# EAGLE board LTC_Balancer (EAGLE 5.06)
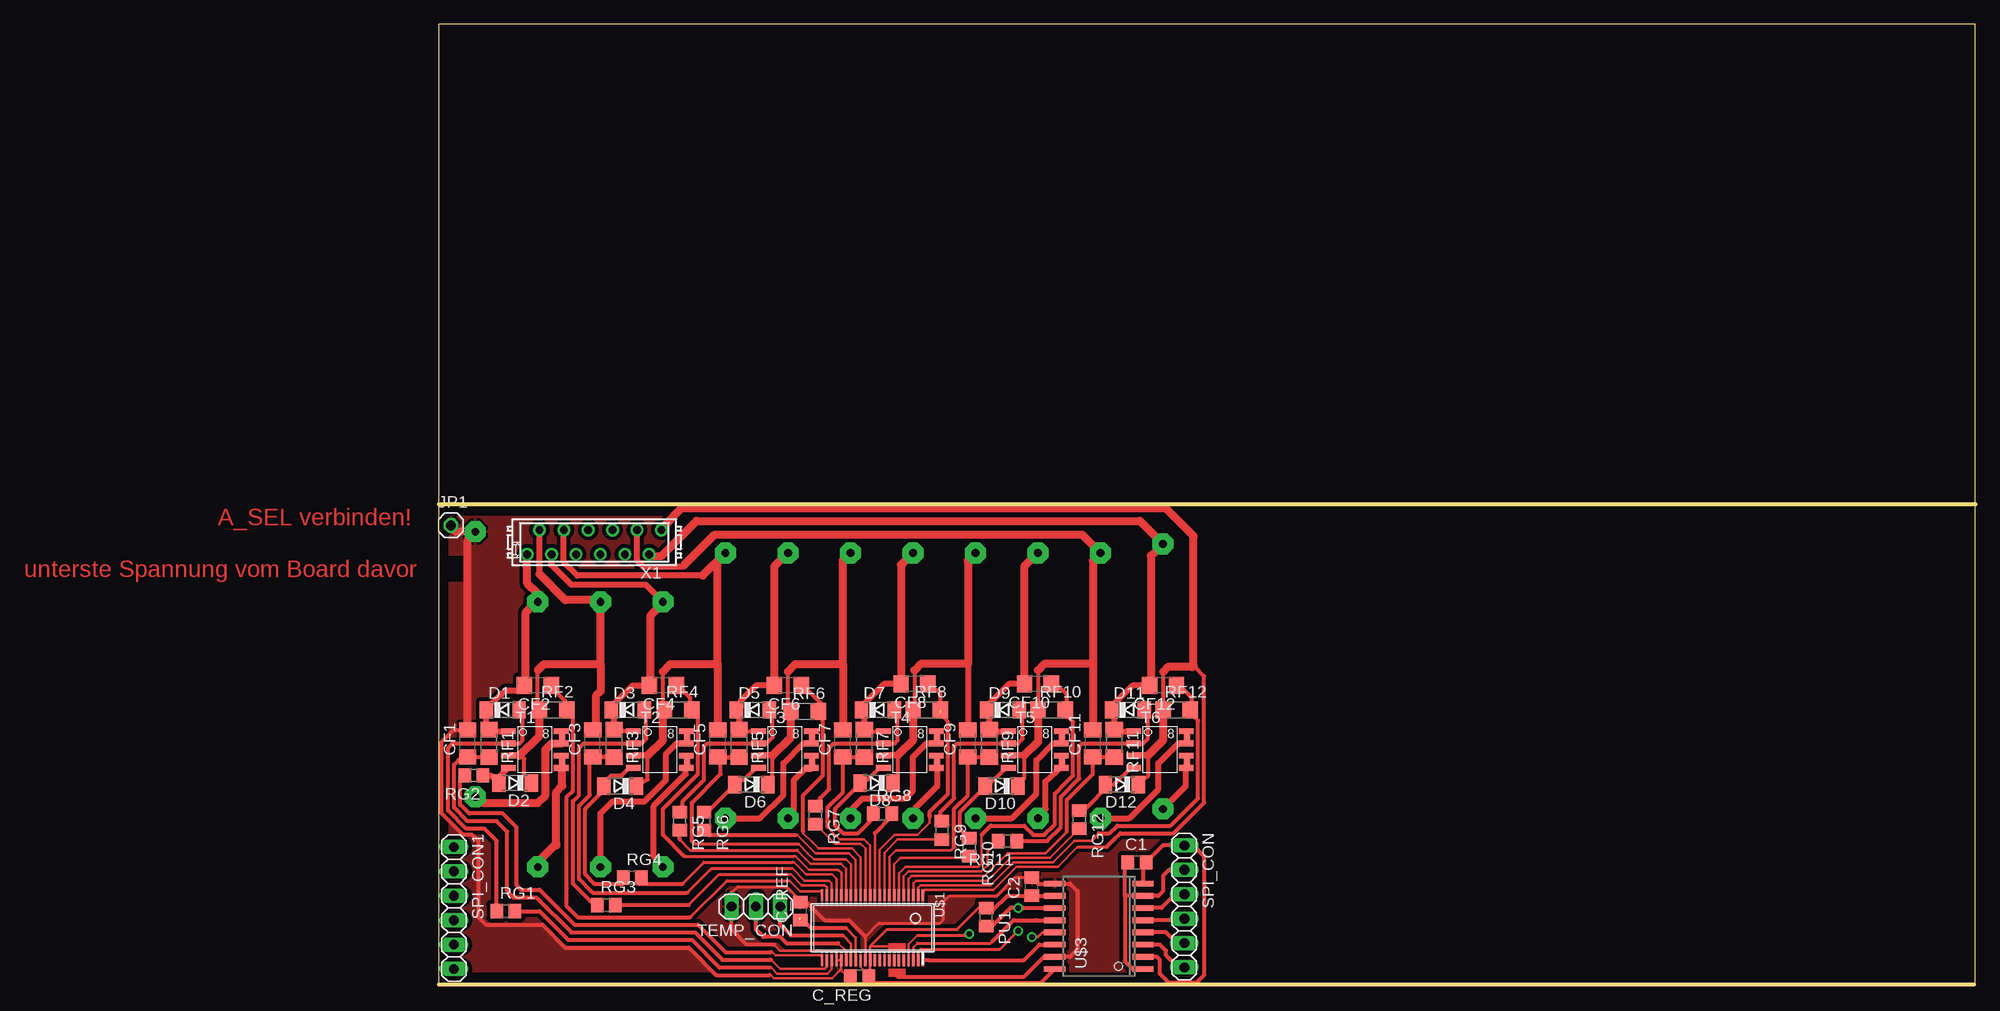
[diagram p0: board, top side]
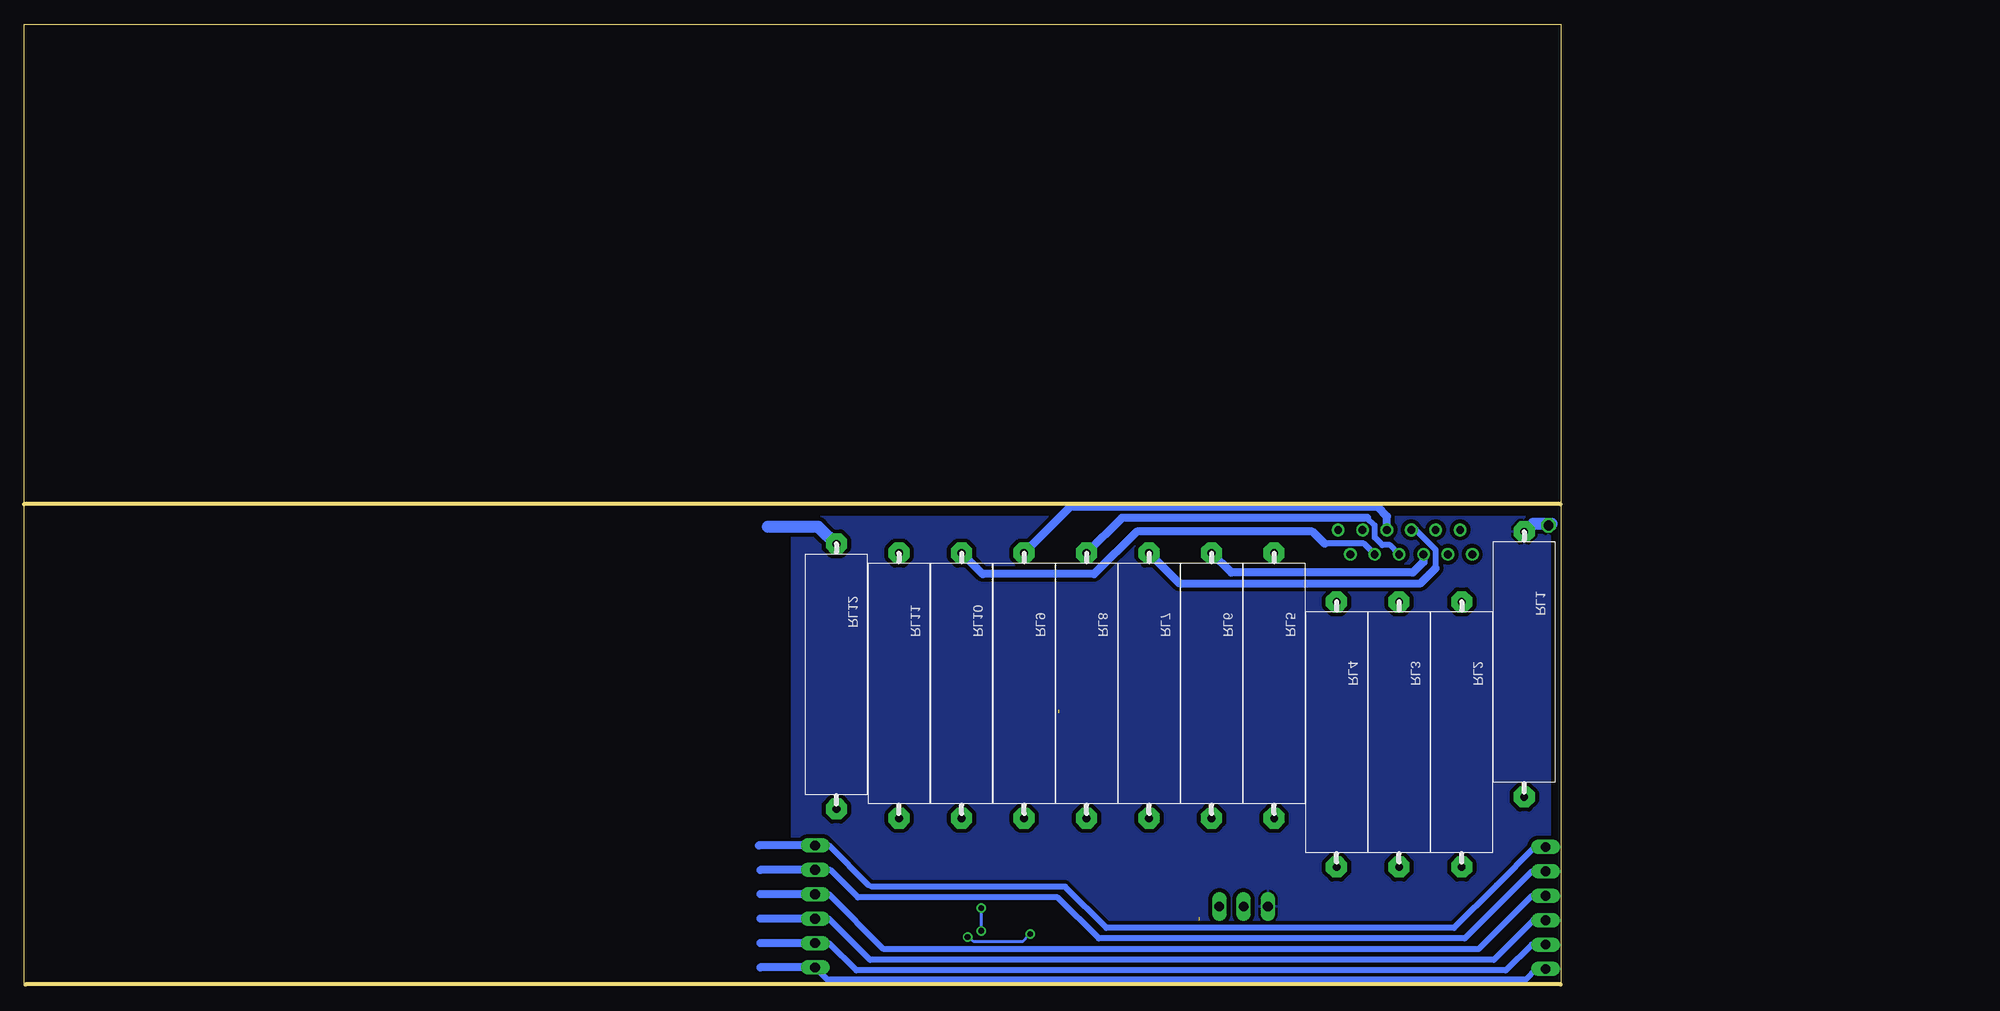
[diagram p1: board, bottom side, seen from below]

Size 160 x 100.01 mm. Coordinates in mm from the lower left corner, seen from the top.
Outline: 160,0.01 160,50.01
Outline: 160,50.01 160,100.01 0,100.01 0,50.01 160,50.01
Outline: 159.84,0 0,0 0,50
Copper layers (1*16): Top 0.035mm / dielectric 1.5mm / Bottom 0.035mm
Design rules "default *": minimum track width 10mil, minimum drill 24mil, track to track 16mil, track to pad 16mil, pad to pad 16mil, via to via 16mil, smd to smd 16mil, copper to edge 40mil, drill to drill 8mil, minimum pad ring 10mil, minimum via ring 8mil, stop-mask expansion 4mil, vias tented up to drill 0mil, thermal gap 10mil

## Footprints (pad centres in the part's own frame; a part is rotated, then mirrored left to right if it is on the bottom)
C0805 = smd 1.3 x 1.5: 1 -0.95,0; 2 0.95,0
C1206 = smd 1.6 x 1.8: 1 -1.4,0; 2 1.4,0
SOD80C = smd 1.4 x 1.8: A 1.7,0; C -1.7,0
1X01 = drill 1.016 octagon: 1 0,0
R0805 = smd 1.3 x 1.5: 1 -0.95,0; 2 0.95,0
R1206 = smd 1.6 x 1.803: 1 -1.422,0; 2 1.422,0
R_5W = drill 0.813 pad 2.184 octagon: 1 0.46,0; 2 28.08,0
1X06 = drill 1.016 long: 1 -6.35,0; 2 -3.81,0; 3 -1.27,0; 4 1.27,0; 5 3.81,0; 6 6.35,0
SO8 = smd 1.524 x 0.61: 1 1.067,4.445; 2 1.067,3.175; 3 1.067,1.905; 4 1.067,0.635; 5 6.553,0.635; 6 6.553,1.905; 7 6.553,3.175; 8 6.553,4.445 | smd 0.61 x 1.524: 9 6.635,3.703; 10 6.635,1.203
1X03 = drill 1.016 long: 1 -2.54,0; 2 0,0; 3 2.54,0
SSOP44DL = smd 0.25 x 1.25: 1 1.1,0.435; 2 1.6,0.435; 3 2.1,0.435; 4 2.6,0.435; 5 3.1,0.435; 6 3.6,0.435; 7 4.1,0.435; 8 4.6,0.435; 9 5.1,0.435; 10 5.6,0.435; 11 6.1,0.435; 12 6.6,0.435; 13 7.1,0.435; 14 7.6,0.435; 15 8.1,0.435; 16 8.6,0.435; 17 9.1,0.435; 18 9.6,0.435; 19 10.1,0.435; 20 10.6,0.435; 21 11.1,0.435; 22 11.6,0.435; 23 11.6,7.185; 24 11.1,7.185; 25 10.6,7.185; 26 10.1,7.185; 27 9.6,7.185; 28 9.1,7.185; 29 8.6,7.185; 30 8.1,7.185; 31 7.6,7.185; 32 7.1,7.185; 33 6.6,7.185; 34 6.1,7.185; 35 5.6,7.185; 36 5.1,7.185; 37 4.6,7.185; 38 4.1,7.185; 39 3.6,7.185; 40 3.1,7.185; 41 2.6,7.185; 42 2.1,7.185; 43 1.6,7.185; 44 1.1,7.185
SO16 = smd 0.6 x 2.2: 1 1.905,1.75; 2 3.175,1.75; 3 4.445,1.75; 4 5.715,1.75; 5 6.985,1.75; 6 8.255,1.75; 7 9.525,1.75; 8 10.795,1.75; 9 10.795,10.95; 10 9.525,10.95; 11 8.255,10.95; 12 6.985,10.95; 13 5.715,10.95; 14 4.445,10.95; 15 3.175,10.95; 16 1.905,10.95
MICROMATCH-12 = drill 0.813 round: 1 6.985,1.27; 2 5.715,-1.27; 3 4.445,1.27; 4 3.175,-1.27; 5 1.905,1.27; 6 0.635,-1.27; 7 -0.635,1.27; 8 -1.905,-1.27; 9 -3.175,1.27; 10 -4.445,-1.27; 11 -5.715,1.27; 12 -6.985,-1.27

## Placement (x,y rotation side)
C1  100n  [C0805]  72.71,12.71 0 top
C2  100n  [C0805]  61.75,10.17 90 top
C_REF  1u  [C0805]  37.62,7.63 90 top
C_REG  1u  [C0805]  43.81,0.8 180 top
CF1  100n  [C1206]  3.02,25.09 90 top
CF2  100n  [C1206]  10.32,31.12 180 top
CF3  100n  [C1206]  16.03,25.09 90 top
CF4  100n  [C1206]  23.34,31.12 180 top
CF5  100n  [C1206]  29.05,25.09 90 top
CF6  100n  [C1206]  36.35,31.12 180 top
CF7  100n  [C1206]  42.07,25.09 90 top
CF8  100n  [C1206]  49.53,31.28 180 top
CF9  100n  [C1206]  55.09,25.09 90 top
CF10  100n  [C1206]  62.39,31.28 180 top
CF11  100n  [C1206]  68.1,25.09 90 top
CF12  100n  [C1206]  75.41,31.12 180 top
D1  [SOD80C]  6.67,28.58 0 top
D2  [SOD80C]  7.94,20.96 180 top
D3  [SOD80C]  19.68,28.58 0 top
D4  [SOD80C]  18.89,20.64 180 top
D5  [SOD80C]  32.7,28.58 0 top
D6  [SOD80C]  32.54,20.8 180 top
D7  [SOD80C]  45.72,28.58 0 top
D8  [SOD80C]  45.56,20.96 180 top
D9  [SOD80C]  58.74,28.58 0 top
D10  [SOD80C]  58.58,20.64 180 top
D11  [SOD80C]  71.75,28.58 0 top
D12  [SOD80C]  71.12,20.8 180 top
JP1  [1X01]  1.27,47.79 0 top
PU1  10k  [R0805]  56.99,6.99 270 top
RF1  100  [R1206]  5.24,25.09 270 top
RF2  100  [R1206]  11.91,28.58 0 top
RF3  100  [R1206]  18.26,25.09 270 top
RF4  100  [R1206]  24.92,28.58 0 top
RF5  100  [R1206]  31.27,25.09 270 top
RF6  100  [R1206]  38.1,28.42 0 top
RF7  100  [R1206]  44.29,25.09 270 top
RF8  100  [R1206]  50.8,28.58 0 top
RF9  100  [R1206]  57.31,25.09 270 top
RF10  100  [R1206]  63.82,28.58 0 top
RF11  100  [R1206]  70.33,25.09 270 top
RF12  100  [R1206]  76.83,28.58 0 top
RG1  3k3  [R0805]  6.99,7.63 0 top
RG2  3k3  [R0805]  3.65,21.75 180 top
RG3  3k3  [R0805]  17.46,8.26 0 top
RG4  3k3  [R0805]  20.16,11.12 0 top
RG5  3k3  [R0805]  25.08,16.99 270 top
RG6  3k3  [R0805]  27.62,16.99 270 top
RG7  3k3  [R0805]  39.21,17.63 270 top
RG8  3k3  [R0805]  46.2,17.79 0 top
RG9  3k3  [R0805]  52.39,16.04 270 top
RG10  3k3  [R0805]  55.24,14.29 270 top
RG11  3k3  [R0805]  59.21,14.93 180 top
RG12  3k3  [R0805]  66.67,17.15 270 top
RL1  R_5W  [R_5W]  3.81,19.06 90 top
RL2  R_5W  [R_5W]  10.32,11.75 90 top
RL3  R_5W  [R_5W]  16.83,11.75 90 top
RL4  R_5W  [R_5W]  23.34,11.75 90 top
RL5  R_5W  [R_5W]  29.85,16.83 90 top
RL6  R_5W  [R_5W]  36.35,16.83 90 top
RL7  R_5W  [R_5W]  42.86,16.83 90 top
RL8  R_5W  [R_5W]  49.37,16.83 90 top
RL9  R_5W  [R_5W]  55.88,16.83 90 top
RL10  R_5W  [R_5W]  62.39,16.83 90 top
RL11  R_5W  [R_5W]  68.9,16.83 90 top
RL12  R_5W  [R_5W]  75.41,17.79 90 top
SPI_CON  [1X06]  77.63,8.1 270 top
SPI_CON1  [1X06]  1.59,7.94 270 top
T1  IRF_7104  [SO8]  6.19,21.91 0 top
T2  IRF_7104  [SO8]  19.21,21.91 0 top
T3  IRF_7104  [SO8]  32.23,21.91 0 top
T4  IRF_7104  [SO8]  45.24,21.91 0 top
T5  IRF_7104  [SO8]  58.26,21.91 0 top
T6  IRF_7104  [SO8]  71.28,21.91 0 top
TEMP_CON  [1X03]  33.02,8.1 180 top
U$1  LTC6802-2  [SSOP44DL]  51.51,9.7 180 top
U$3  ADUM1401  [SO16]  75.09,-0.31 90 top
X1  MICROMATCH-12  [MICROMATCH-12]  16.19,46.04 180 top

## Library data of the parts
C1 C2 C_REF C_REG CF1-CF12 PU1 RF1-RF12 RG1-RG12 = rcl
D1-D12 = diode
JP1 SPI_CON SPI_CON1 TEMP_CON = pinhead
RL1-RL12 = R_Power
T1-T6 = IRF_7104
U$1 = LTC6802
U$3 = ADuM1401
X1 = con-amp-micromatch

## Nets
+5V: C2.1 C_REG.1 PU1.1 U$1.31 U$1.33 U$3.10 U$3.16
A0: U$1.37
A1: U$1.38
A2: U$1.39
A3: U$1.40
ASD: RL5.1 T3.7
BK2: CF2.2 D1.C RF1.1 RL2.2 T1.1 X1.1
BK3: CF3.2 D2.C RF2.1 RL3.2 T1.3 X1.2
BK4: CF4.2 D3.C RF3.1 RL4.2 T2.1 X1.3
BK5: CF5.2 D4.C RF4.1 RL5.2 T2.3 X1.4
BK6: CF6.2 D5.C RF5.1 RL6.2 T3.1 X1.5
BK7: CF7.2 D6.C RF6.1 RL7.2 T3.3 X1.6
BK8: CF8.2 D7.C RF7.1 RL8.2 T4.1 X1.7
BK9: CF9.2 D8.C RF8.1 RL9.2 T4.3 X1.8
BK10: CF10.2 D9.C RF9.1 RL10.2 T5.1 X1.9
BK11: CF11.2 D10.C RF10.1 RL11.2 T5.3 X1.10
BK12: CF12.2 D11.C RF11.1 RL12.2 T6.1 X1.11
C1: CF1.1 RF1.2 U$1.24
C2: CF2.1 RF2.2 U$1.22
C3: CF3.1 RF3.2 U$1.20
C4: CF4.1 RF4.2 U$1.18
C5: CF5.1 RF5.2 U$1.16
C6: CF6.1 RF6.2 U$1.14
C7: CF7.1 RF7.2 U$1.12
C8: CF8.1 RF8.2 U$1.10
C9: CF9.1 RF9.2 U$1.8
C10: CF10.1 RF10.2 U$1.6
C11: CF11.1 RF11.2 U$1.4
C12: CF12.1 RF12.2 U$1.2
CS: SPI_CON1.6 SPI_CON.6 U$3.3
CSBI: U$1.44 U$3.14
GND_MC: C1.2 SPI_CON1.1 SPI_CON.1 U$3.2 U$3.8
GPIO1: U$1.35
MISO: SPI_CON1.3 SPI_CON.3 U$3.6
MOSI: SPI_CON1.4 SPI_CON.4 U$3.5
N$2: TEMP_CON.1 U$1.29
N$3: C_REF.1 U$1.30
N$4: TEMP_CON.2 U$1.28
N$5: RL3.1 T2.7
N$6: RL4.1 T2.5
N$8: RL1.1 T1.7
N$9: RL2.1 T1.5
N$10: RL6.1 T3.5
N$11: RL7.1 T4.7
N$12: RL8.1 T4.5
N$13: RL9.1 T5.7
N$14: RL10.1 T5.5
N$15: RL11.1 T6.7
N$16: RL12.1 T6.5
N$17: D1.A RG1.1 T1.2
N$23: D2.A RG2.1 T1.4
N$55: D3.A RG3.1 T2.2
N$56: D4.A RG4.1 T2.4
N$57: D5.A RG5.1 T3.2
N$58: D7.A RG7.1 T4.2
N$59: D6.A RG6.1 T3.4
N$60: D8.A RG8.1 T4.4
N$61: D9.A RG9.1 T5.2
N$62: D10.A RG10.1 T5.4
N$63: D11.A RG11.1 T6.2
N$64: D12.A RG12.1 T6.4
S1: RG1.2 U$1.25
S2: RG2.2 U$1.23
S3: RG3.2 U$1.21
S4: RG4.2 U$1.19
S5: RG5.2 U$1.17
S6: RG6.2 U$1.15
S7: RG7.2 U$1.13
S8: RG8.2 U$1.11
S9: RG9.2 U$1.9
S10: RG10.2 U$1.7
S11: RG11.2 U$1.5
S12: RG12.2 U$1.3
SCK: SPI_CON1.5 SPI_CON.5 U$3.4
SCKI: U$1.41 U$3.13
SDI: U$1.42 U$3.12
SDO: PU1.2 U$1.43 U$3.11
V+: D12.C RF12.1 T6.3 U$1.1 X1.12
V-: C2.2 C_REF.2 C_REG.2 CF1.2 JP1.1 RL1.2 TEMP_CON.3 U$1.26 U$1.27 U$1.32 U$3.9 U$3.15
VCC_MC: C1.1 SPI_CON1.2 SPI_CON.2 U$3.1 U$3.7

## Tracks (layer width: path | path; a pad name or v marks a point on that pad's centre or on a via)
+5V
  Top 0.254: 44.92,1.44 C_REG.1 45.24,0.17 | 44.92,1.44 44.92,2.5 U$1.33 44.91,3.96 44.93,3.98 46.99,3.98 47.15,3.82 | U$1.31 43.91,1.81 44.29,1.44 44.92,1.44 | 56.2,7.94 PU1.1
  Top 0.305: 44.93,3.98 46.67,5.72 53.98,5.72 56.2,7.94
  Top 0.406: U$3.10 62.39,9.21 C2.1 59.22,9.22 57.78,7.79 PU1.1 | 45.24,0.17 62.71,0.17 U$3.16
ASD
  Top 0.406: 37.94,25.09 T3.7
  Top 0.61: RL5.1 33.48,17.29 35.88,19.69 35.88,23.03 37.94,25.09
BK2
  Top 0.406: 5.07,26.36 RF1.1 5.09,26.51 4.92,26.68 | 4.92,28.47 D1.C 4.81,28.6 | 8.73,30.62 CF2.2 9.05,31.25 | 10.14,39.83 RL2.2
  Top 0.61: 5.07,26.36 T1.1 | 4.92,26.68 4.92,28.47 | 4.81,28.6 6.51,30.17 6.96,30.62 8.73,30.62 | RL2.2 10.34,40.63 | 9.21,44.62 X1.1
  Top 0.813: 10.14,39.83 9.05,38.74 9.05,31.25 | 10.34,40.63 9.21,41.76 9.21,44.62
BK3
  Top 0.406: 8.41,23.82 8.89,23.5 8.89,21.8 D2.C | RF2.1 10.17,29.06 10.32,29.22 10.32,32.71 | 16.35,26.84 16.03,26.52 CF3.2 | RL3.2 16.65,40.01
  Top 0.61: 8.41,23.82 T1.3 | 10.48,42.71 X1.2
  Top 0.813: RF2.1 10.48,25.89 8.41,23.82 | 10.32,32.71 10.95,33.34 16.83,33.34 | 16.83,33.34 16.83,30.49 16.35,30.01 16.35,26.84 | 16.83,33.34 RL3.2 | 16.65,40.01 13.18,40.01 10.48,42.71 | X1.2
BK4
  Top 0.406: 23.34,39.69 RL4.2 | CF4.2 22.07,31.31 | 18.26,29.22 18.26,28.69 D3.C 18.14,28.06 18.26,27.63 | RF3.1 19.06,26.51 19.21,26.36 T2.1
  Top 0.61: CF4.2 20.16,31.12 18.26,29.22 | RF3.1 18.26,27.63 | X1.3 11.75,44.62 11.75,43.66 12.7,42.71 | 12.7,42.71 13.81,41.6 21.57,41.6 RL4.2 | 12.7,42.71
  Top 0.813: 23.34,39.69 22.07,38.42 22.07,31.31
BK5
  Top 0.406: 21.75,23.82 21.75,21.33 D4.C | 23.34,28.42 RF4.1 23.5,29.06 23.34,29.22 | 23.34,29.22 23.65,28.9 | 23.34,29.22 23.34,32.55 | RL5.2 29.84,44.93 29.05,43.98
  Top 0.61: 21.75,23.82 T2.3 | 27.48,42.55 14.45,42.55 13.02,43.98 13.02,47.16 X1.4
  Top 0.813: 21.75,23.82 23.34,25.41 23.34,28.42 | 23.34,32.55 24.13,33.34 29.05,33.34 | 29.05,33.34 29.05,29.53 CF5.2 | 29.05,33.34 29.05,43.98 | RL5.2 27.48,42.55
BK6
  Top 0.406: RL6.2 36.35,44.93 | 34.92,31.41 CF6.2 | 31.43,28.85 D5.C | 31.32,28.22 31.27,27.79 | RF5.1 31.9,26.35 32.54,26.36 T3.1
  Top 0.61: CF6.2 33.02,31.12 31.43,29.53 31.43,28.85 | D5.C 31.32,28.22 | 31.27,27.79 RF5.1
  Top 0.813: 36.35,44.93 34.92,43.5 34.92,31.41
  Bottom 0.813: X1.5 14.29,43.98 15.4,42.87 34.31,42.87 RL6.2
BK7
  Top 0.406: D6.C 34.56,21.39 34.77,21.6 34.77,23.82 | RF6.1 36.84,29.06 36.35,29.38 36.35,32.55
  Top 0.61: 34.77,23.82 T3.3 | 42.07,44.14 42.7,44.77
  Top 0.813: RF6.1 36.68,25.73 34.77,23.82 | 36.35,32.55 37.15,33.34 42.07,33.34 | 42.7,44.77 RL7.2 | 42.07,33.34 CF7.2 | 42.07,33.34 42.07,44.14
  Bottom 0.61: 13.02,43.35 13.02,45.25 15.08,47.31 15.4,47.31 X1.6
  Bottom 0.813: RL7.2 39.71,41.76 14.61,41.76 13.02,43.35
BK8
  Top 0.406: 44.29,28.11 44.18,28.06 D7.C 44.45,28.85 44.45,29.38 | RF7.1 44.93,26.35 45.88,26.36 T4.1
  Top 0.61: 44.29,28.11 RF7.1 | CF8.2 46.35,31.28 44.45,29.38
  Top 0.813: CF8.2 48.13,43.67 RL8.2
  Bottom 0.61: X1.7 17.78,45.73 18.57,45.73 19.37,46.52 19.37,47.79 20.16,48.58
  Bottom 0.813: RL8.2 45.7,48.58 20.16,48.58
BK9
  Top 0.406: 47.78,23.82 47.78,21.33 D8.C | RF8.1 49.38,29.06 49.53,29.22 49.53,32.71 | 55.09,26.65 CF9.2
  Top 0.61: 47.78,23.82 T4.3 | 55.09,33.34 55.09,26.65
  Top 0.813: RF8.1 49.38,25.41 47.78,23.82 | 49.53,32.71 50.16,33.34 55.09,33.34 55.09,44.12 RL9.2
  Bottom 0.406: X1.8 18.1,47.16
  Bottom 0.813: 18.1,47.16 18.1,48.74 19.05,49.7 51.1,49.7 RL9.2
BK10
  Top 0.406: RL10.2 62.37,44.91 | 60.96,31.25 CF10.2 | 57.47,29.38 57.15,29.17 D9.C 57.51,28.69 57.31,28.11 | RF9.1 57.95,26.35 | 59.21,26.36 T5.1
  Top 0.61: CF10.2 59.37,31.28 57.47,29.38 | 57.31,28.11 RF9.1 | 57.95,26.35 59.21,26.36
  Top 0.813: 62.37,44.91 60.96,43.5 60.96,31.25
  Bottom 0.406: X1.9 19.37,44.62
  Bottom 0.61: X1.9 20.48,45.89 24.61,45.89
  Bottom 0.813: RL10.2 60.19,42.71 48.58,42.71 44.13,47.16 25.88,47.16 24.61,45.89
BK11
  Top 0.406: D10.C 60.44,21.23 60.96,21.44 60.96,23.82 | RF10.1 62.24,28.75 62.39,28.9 62.39,32.71
  Top 0.61: 60.96,23.82 T5.3 | X1.10 20.64,44.14 21.27,43.5 24.61,43.5 25.4,43.5 25.56,43.66
  Top 0.813: RF10.1 62.4,25.25 60.96,23.82 | 62.39,32.71 63.02,33.34 68.1,33.34 | 68.1,33.34 CF11.2 | 68.1,33.34 68.1,44.12 RL11.2 66.97,46.84 28.73,46.84 25.56,43.66
BK12
  Top 0.406: RF11.1 70.8,26.36 | 70.33,27.99 D11.C 70.21,29.1 | RL12.2 75.39,45.71 | 74.14,31.09 CF12.2
  Top 0.61: 70.8,26.36 T6.1 | 70.33,27.99 RF11.1 | 70.21,29.1 72.23,31.12 CF12.2 | X1.11 21.91,44.62
  Top 0.813: 75.39,45.71 74.14,44.62 74.14,31.09 | 21.91,44.62 23.18,44.62 26.83,48.27 73.01,48.27 RL12.2
C1
  Top 0.254: 34.61,2.55 35.56,1.59 40.16,1.59 40.41,1.84 U$1.24
  Top 0.406: RF1.2 4.9,23.69 CF1.1 2.38,23.5 2.38,23.66 1.59,22.87 1.59,18.42 3.02,16.99 6.03,16.99 7.14,15.88 7.14,9.69 7.78,9.06 10.16,9.06 13.81,5.4 26.67,5.4 29.53,2.55 34.61,2.55 34.45,2.55
C2
  Top 0.254: 36.35,10.8 36.51,10.8 37.62,9.69 39.85,9.69 39.85,9.33 U$1.22
  Top 0.305: 26.19,6.99 30,10.8 36.35,10.8
  Top 0.406: RF2.2 12.86,28.1 | RF2.2 13.18,28.58 13.97,27.79 13.97,20.17 13.34,19.53 13.34,10.01 13.34,8.1 14.45,6.99 26.19,6.99 | CF2.1 11.91,30.8 13.18,29.53 13.18,28.75 RF2.2
C3
  Top 0.254: 36.67,12.07 36.83,12.07 38.1,10.8 40.64,10.8 40.91,10.53 U$1.20
  Top 0.305: 25.88,9.53 28.42,12.07 36.67,12.07
  Top 0.406: CF3.1 18.55,23.69 RF3.2 16.2,23.67 15.72,23.18 15.72,19.69 14.61,18.58 14.61,10.96 16.03,9.53 25.88,9.53
C4
  Top 0.254: 36.99,13.34 37.15,13.34 38.58,11.91 41.59,11.91 41.91,11.59 U$1.18
  Top 0.305: 25.56,13.34 36.99,13.34
  Top 0.406: CF4.1 25.05,30.99 26.19,29.85 26.19,28.73 RF4.2 26.35,28.43 26.99,27.63 26.99,21.91 23.34,18.26 23.34,15.56 25.56,13.34
C5
  Top 0.254: 38.42,13.66 | 38.42,13.66 39.05,13.02 42.39,13.02 42.91,12.5 U$1.16 | 38.42,13.66 | 37.47,14.61 38.42,13.66
  Top 0.305: 26.35,14.93 26.67,14.61 37.47,14.61
  Top 0.406: CF5.1 31.89,23.37 RF5.2 29.53,23.67 29.37,23.5 29.37,21.91 26.35,18.9 26.35,14.93
C6
  Top 0.254: U$1.14 43.91,13.24 43.02,14.14 39.53,14.14 38.89,14.77 37.94,15.72 37.94,15.88
  Top 0.406: CF6.1 38.39,30.67 39.85,29.22 39.85,28.75 RF6.2 39.68,28.43 40.01,27.31 40.01,21.76 37.94,19.69 37.94,15.88
C7
  Top 0.254: 44.61,14.77 44.29,15.09 41.75,15.09 40.48,16.36 | 44.61,14.77 44.93,14.45 | U$1.12 44.91,14.47 44.61,14.77
  Top 0.406: RF7.2 43.04,23.67 CF7.1 42.07,20.01 40.48,18.42 40.48,16.36
C8  (1 unrouted)
  Top 0.254: U$1.10 45.91,14.01 47.47,15.56 49.85,15.56 51.12,16.83 51.12,17.47
  Top 0.406: RF8.2 52.22,30.31 CF8.1 50.61,31.79 50.64,31.76 | 52.23,29.06 52.23,28.26 53.02,27.31 53.02,19.85 51.12,17.95 51.12,17.63 51.12,17.47
C9
  Top 0.254: 46.91,12.63 46.91,13.26 47.62,13.98 53.34,13.98 53.66,14.29 | U$1.8 46.91,12.63 | 46.91,12.63
  Top 0.406: RF9.2 56.38,23.67 CF9.1 55.09,19.69 53.66,18.26 53.66,16.52 53.66,16.04 53.66,14.29
C10
  Top 0.254: 56.52,15.56 56.52,12.55 56.2,12.23 53.34,12.23 50.01,12.23 48.58,12.23 47.91,11.57 U$1.6
  Top 0.406: CF10.1 64.42,31.15 65.41,30.17 65.41,28.89 RF10.2 65.24,27.95 66.04,27.31 66.04,21.76 65.25,20.96 | 64.14,17.95 64.14,19.85 65.25,20.96 | 65.25,20.96 | 64.14,17.95 | 64.14,17.95 64.14,16.68 63.02,15.56 61.91,15.56 60.96,16.52 57.47,16.52 56.52,15.56 | 56.52,15.56
C11
  Top 0.254: 54.45,11.28 53.98,11.28 | 54.45,11.28 56.83,11.28 59.21,13.66 63.18,13.66 | U$1.4 48.91,10.98 49.21,11.28 54.45,11.28 | 54.45,11.28
  Top 0.305: 63.18,13.66 65.41,15.88
  Top 0.406: RF11.2 70.94,23.69 CF11.1 68.1,21.91 65.41,19.22 65.41,15.88
C12
  Top 0.254: 67.94,14.93 66.2,14.93 63.98,12.71 59.85,12.71 57.47,10.33 50.16,10.33 49.91,10.07 U$1.2 | 67.94,14.93
  Top 0.305: 67.94,14.93 68.74,15.72
  Top 0.406: CF12.1 77.28,30.99 78.42,29.85 78.42,28.89 RF12.2 78.73,27.79 79.06,27.47 79.06,19.37 76.2,16.52 70.64,16.52 69.85,15.72 68.74,15.72
CS
  Top 0.406: SPI_CON.6 77.31,1.44 75.72,3.02 75.72,3.5 75.09,4.13 U$3.3
  Bottom 0.406: SPI_CON.6
  Bottom 0.61: SPI_CON1.6 2.54,1.59 3.65,0.48 76.36,0.48 SPI_CON.6
  Bottom 0.813: SPI_CON.6 83.34,1.75
CSBI
  Top 0.254: U$1.44 50.93,2.51 50.64,2.55
  Top 0.406: U$3.14 62.55,4.13 60.93,2.51 50.99,2.51 50.64,2.55
GND_MC
  Top 0.406: U$3.8 73.34,12.71 C1.2 75.41,14.45 SPI_CON.1 | U$3.2 74.77,2.86 75.09,2.55 75.09,1.12 76.04,0.17 78.9,0.17 79.69,0.96 79.69,13.34 78.58,14.45 SPI_CON.1 | SPI_CON.1
  Bottom 0.406: SPI_CON.1
  Bottom 0.61: SPI_CON1.1 2.7,14.29 6.67,10.33 11.11,5.88 47.31,5.88 51.59,10.17 71.75,10.17 72.07,10.33 76.2,14.45 SPI_CON.1
  Bottom 0.813: SPI_CON.1 83.5,14.45
MISO
  Top 0.406: U$3.6 75.25,7.94 76.68,9.37 | 76.68,9.37 | SPI_CON.3 76.68,9.37
  Bottom 0.61: SPI_CON1.3 3.02,9.21 8.57,3.66 70.48,3.66 76.2,9.37 SPI_CON.3 | SPI_CON.3 | SPI_CON.3
  Bottom 0.813: SPI_CON.3 83.34,9.37
MOSI
  Top 0.406: U$3.5 76.36,6.67 SPI_CON.4
  Bottom 0.61: SPI_CON1.4 2.86,6.67 6.99,2.55 71.91,2.55 76.2,6.83 SPI_CON.4 | SPI_CON.4 | SPI_CON.4
  Bottom 0.813: SPI_CON.4 83.34,6.83
N$2
  Top 0.254: 42.91,4.24 U$1.29
  Top 0.305: 42.07,5.09 42.91,4.24
  Top 0.406: TEMP_CON.1 35.56,6.2 36.67,5.09 38.89,5.09 42.07,5.09
N$3  (1 unrouted)
  Top 0.254: 43.41,4.85 U$1.30
  Top 0.305: 42.39,5.88 43.41,4.85
  Top 0.406: 37.62,6.99 38.73,5.88 42.39,5.88
N$4
  Top 0.254: U$1.28 42.41,3.47 41.59,4.29
  Top 0.406: TEMP_CON.2 33.02,5.72 33.81,4.93 35.56,4.93 36.2,4.29 41.59,4.29
N$5
  Top 0.61: T2.7 24.77,25.09 23.65,23.98 23.65,21.28 21.41,19.04 18.08,19.04 16.83,17.79 RL3.1
N$6
  Top 0.406: RL4.1 23.19,12.53
  Top 0.61: 23.19,12.53 22.38,13.34 22.38,18.58 25.72,21.91 25.72,22.43 T2.5
N$7
  Top 0.406: 48.26,0.8 60.96,0.8 63.02,2.86 63.98,2.86
N$8
  Top 0.813: RL1.1 3.83,19.36 4.6,18.9 10.3,18.88 11.11,19.69 11.11,24.45 11.75,25.09 T1.7
N$9
  Top 0.406: RL2.1 10.32,12.71 | 12.86,22.43 T1.5
  Top 0.813: 10.32,12.71 12.22,14.61 | 12.22,14.45 12.22,14.61 | 12.22,14.61 12.22,20.01 12.86,20.64 12.86,22.43
N$10
  Top 0.406: RL6.1 36.35,17.31 | 38.73,22.43 T3.5
  Top 0.61: 36.35,17.31 36.99,17.95 36.99,21.28 38.14,22.43 38.73,22.43
N$11
  Top 0.61: RL7.1 42.86,18.1 43.34,18.58 44.12,19.36 48.58,19.37 49.37,20.17 49.37,23.66 50.8,25.09 T4.7
N$12
  Top 0.406: 51.91,22.35 T4.5
  Top 0.61: RL8.1 49.67,18.41 51.91,20.64 51.91,22.35
N$13
  Top 0.61: RL9.1 59.67,17.29 62.23,19.85 62.23,23.34 63.98,25.09 T5.7
N$14
  Top 0.406: RL10.1 62.39,17.31 | 64.93,22.71 64.93,22.66 T5.5
  Top 0.61: 62.39,17.31 63.18,18.26 63.17,21.1 64.93,22.71
N$15
  Top 0.61: RL11.1 71.9,17.29 74.93,20.33 74.93,23.03 76.99,25.09 T6.7
N$16
  Top 0.406: RL12.1 75.39,18.25 | 77.79,22.5 T6.5
  Top 0.61: 75.39,18.25 77.79,20.64 77.79,22.5
N$17
  Top 0.406: RG1.1 6.03,14.93 4.76,16.2 2.86,16.2 0.95,18.1 0.95,24.61 1.43,25.09 T1.2 8.41,25.09 8.73,25.41 8.73,27.79 8.37,28.47 D1.A
N$18
  Top 0.406: 48.42,0.8 47.78,0.8 47.31,1.28
N$23
  Top 0.61: RG2.1 5.44,21.76 D2.A 6.24,21.53 T1.4
N$29
  Bottom 1.27: 75.41,45.73 77.31,47.63 82.55,47.63
N$30
  Bottom 1.27: 0.95,47.95 2.86,47.95 3.81,47
N$55
  Top 0.406: D3.A 21.43,28.47 21.27,28.11 21.59,27.95 21.59,25.57 21.11,25.09 T2.2 15.08,25.09 14.61,24.61 14.61,19.69 13.97,19.06 13.97,10.48 16.03,8.42 16.35,7.94 RG3.1
N$56
  Top 0.406: T2.4 19.84,22.55 19.05,21.76 17.94,21.76 17.14,20.96 16.94,20.96 D4.A 17.62,20.64 15.24,18.26 15.24,11.44 16.19,10.48 19.21,10.48 19.21,10.8 RG4.1
N$57
  Top 0.406: D5.A 34.4,28.63 34.77,27.79 34.77,25.72 34.13,25.09 T3.2 27.94,25.09 27.62,24.77 27.62,21.28 25.4,19.06 25.4,17.47 RG5.1
N$58
  Top 0.406: D7.A 47.74,28.31 47.78,27.95 47.78,25.41 47.47,25.09 T4.2 41.12,25.09 40.64,24.61 40.64,20.33 39.69,19.37 39.69,19.05 RG7.1
N$59
  Top 0.406: 33.81,22.55 T3.4 33.02,22.55 31.75,21.28 31.39,21.28 D6.A 27.82,17.78 RG6.1
N$60
  Top 0.406: T4.4 45.88,22.55 44.29,20.96 D8.A 43.81,20.8 41.27,18.26 41.27,16.52 42.07,15.72 43.66,15.72 45.25,17.31 RG8.1
N$61
  Top 0.406: D9.A 60.91,28.31 60.8,27.79 60.8,25.57 60.33,25.09 T5.2 53.98,25.09 53.66,24.77 53.66,19.37 52.23,17.95 52.23,16.99 RG9.1
N$62
  Top 0.406: T5.4 58.78,22.39 59.05,22.55 57.15,20.64 D10.A 57.15,20.8 54.29,17.95 54.29,16.52 54.29,16.2 RG10.1
N$63
  Top 0.406: D11.A 73.61,28.63 73.82,27.79 73.82,25.57 73.34,25.09 T6.2 66.99,25.09 66.67,24.77 66.67,21.44 64.77,19.53 64.77,16.36 63.35,14.92 RG11.1
N$64
  Top 0.406: T6.4 72.12,22.55 72.07,22.55 70.33,20.8 D12.A 69.85,20.8 67.31,18.26 66.99,18.1 66.83,18.1 RG12.1
S1
  Top 0.254: 34.45,1.75 34.61,1.75 35.24,1.12 40.48,1.12 40.91,1.55 U$1.25
  Top 0.406: RG1.2 10.48,7.63 13.49,4.61 23.81,4.61 23.97,4.61 26.35,4.61 29.21,1.75 34.45,1.75
S2
  Top 0.254: 34.61,3.34 34.77,3.34 35.08,3.02 39.88,3.02 U$1.23
  Top 0.406: 34.61,3.34 29.84,3.34 26.99,6.2 14.13,6.2 10.48,9.85 8.57,9.85 8.41,10.01 8.1,10.33 8.1,16.36 6.67,17.79 3.17,17.79 2.22,18.74 2.22,21.12 RG2.2
S3
  Top 0.254: 36.51,11.44 36.67,11.44 37.78,10.33 40.16,10.33 40.41,10.08 U$1.21
  Top 0.305: 26.04,8.26 29.21,11.44 36.51,11.44
  Top 0.406: RG3.2 22.23,8.26 26.04,8.26
S4
  Top 0.254: 36.83,12.71 36.99,12.71 38.26,11.44 40.96,11.44 41.43,10.96 41.43,9.29 U$1.19
  Top 0.305: 25.4,10.48 27.62,12.71 36.83,12.71
  Top 0.406: RG4.2 20.95,10.65 20.95,10.8 20.8,10.48 25.4,10.48
S5
  Top 0.254: 37.31,13.98 38.26,13.02 38.73,12.55 41.91,12.55 42.41,12.05 U$1.17
  Top 0.305: 25.08,15.09 26.19,13.98 37.31,13.98
  Top 0.406: 25.08,15.09 RG5.2
S6
  Top 0.254: 37.15,15.56 37.31,15.56 39.21,13.66 42.7,13.66 43.41,12.95 U$1.15
  Top 0.406: RG6.2 27.94,15.57 33.97,15.56 37.15,15.56
S7
  Top 0.254: U$1.13 44.41,14.14 43.94,14.61 41.27,14.61 RG7.2
  Top 0.406: RG7.2
S8
  Top 0.254: U$1.11 45.41,15.71 45.4,15.72
  Top 0.406: RG8.2 47.15,17.63 47.15,17.47 45.4,15.72
S9
  Top 0.254: 46.41,13.72 47.78,15.09 RG9.2 | U$1.9 46.41,13.72 | 46.41,13.72
S10
  Top 0.254: RG10.2 55.24,13.18 48.1,13.18 47.41,12.49 U$1.7
  Top 0.406: RG10.2 55.24,13.18
S11
  Top 0.254: RG11.2 57.15,13.82 57.15,12.39 56.52,11.75 48.9,11.75 48.41,11.27 U$1.5
S12
  Top 0.254: 54.13,10.8 57.15,10.8 59.53,13.18 63.66,13.18 66.52,16.04 RG12.2 | U$1.3 49.41,10.53 49.69,10.8 54.13,10.8 | 54.13,10.8
SCK
  Top 0.406: U$3.4 75.72,5.4 76.83,4.29 77.15,4.29 SPI_CON.5
  Bottom 0.61: SPI_CON1.5 3.02,4.13 5.71,1.44 73.34,1.44 76.2,4.29 SPI_CON.5 | SPI_CON.5
  Bottom 0.813: SPI_CON.5 83.34,4.29
SCKI  (via drill 0.6)
  Top 0.254: U$1.41 48.91,4.15 49.85,5.09 | U$3.13
  Top 0.305: 49.85,5.09 55.4,5.09 55.56,5.25 v55.24,5.25 | v61.75,4.93 62.39,4.93 62.87,5.4 U$3.13
  Bottom 0.254: v55.24,5.25 55.4,5.09 | 61.59,4.93 v61.75,4.93
  Bottom 0.305: 55.4,5.09 56.04,4.45 61.12,4.45 61.59,4.93
SDI
  Top 0.254: U$1.42 49.41,3.86 49.85,4.29 | 57.47,4.29 57.63,4.45
  Top 0.305: 49.85,4.29 57.47,4.29
  Top 0.406: 57.63,4.45 59.85,6.67 62.23,6.67 U$3.12
SDO  (via drill 0.6)
  Top 0.254: U$1.43 49.91,3.41 50.16,3.66 | U$3.11 | v60.33,7.95 59.53,7.95
  Top 0.305: 50.16,3.66 58.42,3.66 v60.33,5.56
  Top 0.406: 59.53,7.95 59.53,7.94 | 59.53,7.94 57.63,6.04 PU1.2 | 62.39,7.94 62.39,7.95 | 62.39,7.94 U$3.11 | 60.48,7.94 62.39,7.94 | 60.48,7.94 v60.33,7.94 v60.33,7.95 | 60.48,7.94 59.53,7.94
  Bottom 0.305: v60.33,5.56 v60.33,7.95
V+
  Top 0.254: 66.52,14.29 64.45,12.23 60.17,12.23 57.78,9.85 50.64,9.85 50.53,9.74 U$1.1
  Top 0.305: 66.52,14.29 68.1,14.29 69.53,14.29 | 66.52,14.29
  Top 0.406: 73.82,23.82 73.82,21.64 D12.C | 75.41,32.56 RF12.1 | 78.42,33.03 78.74,33.03 79.69,32.07 79.69,18.9 76.52,15.72 70.96,15.72 70.33,15.09 | 70.33,15.09 | 69.53,14.29 70.33,15.09
  Top 0.61: 73.82,23.82 T6.3 | 23.34,47.63 X1.12 | 78.42,33.03 78.58,33.19
  Top 0.813: RF12.1 75.41,25.41 73.82,23.82 | 75.41,32.56 75.88,33.03 78.42,33.03 | 23.34,47.63 25.24,49.54 75.72,49.54 78.58,46.68 78.58,33.19
V-
  Top 0.254: 34.92,4.13 35.56,3.5 41.12,3.5 41.43,3.18 41.43,2.54 U$1.26 U$1.27 41.91,1.59 41.83,1.51 | 34.45,0.96 34.61,0.96 34.92,0.64 40.96,0.64 41.83,1.51 | 44.41,4.97 U$1.32 | 37.94,8.89 C_REF.2 37.15,9.21 | C_REG.2 42.55,0.8 41.83,1.51 | 30.48,5.72 | 36.2,10.17
  Top 0.305: 30.48,9.53 31.11,10.17 36.2,10.17 37.15,9.21 | 44.41,4.97 45.8,6.36 52.19,6.36 52.55,6.71 52.55,8.58 53.18,9.21 58.1,9.21 60.01,11.12 C2.2
  Top 0.406: CF1.2 1.56,26.49 0.32,25.25 0.32,17.79 2.54,15.56 3.49,15.56 4.13,14.93 4.13,6.99 4.92,6.2 10.79,6.2 13.18,3.82 26.04,3.82 26.35,3.5 28.89,0.96 34.45,0.96 | 3.63,47.14 RL1.2 | 34.92,4.13 32.07,4.13 30.48,5.72 TEMP_CON.3 30.48,9.53 | 44.41,4.97 42.7,6.67 40.16,6.67 37.94,8.89 | U$3.15 65.72,2.86 66.52,3.66 66.52,9.69 65.72,10.48 U$3.9 | U$3.9 | U$3.9 62.39,10.48 C2.2
  Top 0.61: RL1.2
  Top 0.813: 3.63,47.14 3.02,46.2 CF1.2 | RL1.2 1.76,47.14 1.59,47.31 JP1.1
  pour Bottom: 0,0.01 80.01,0.01 80.01,50.01 0,50.01
  pour Top: 0,50.01 0,0.01 80.01,0.01 80.01,50.01
VCC_MC
  Top 0.406: C1.1 71.44,12.86 71.44,9.21 | 71.44,9.21 U$3.7 74.93,9.21 75.41,9.69 75.41,11.28 76.04,11.91 76.52,11.91 SPI_CON.2 | U$3.1 72.23,1.59 71.44,2.39 71.44,9.21
  Bottom 0.406: SPI_CON.2 | SPI_CON.2
  Bottom 0.61: SPI_CON1.2 3.02,11.75 5.4,9.37 10,4.77 48.1,4.77 52.39,9.06 73.18,9.06 73.5,9.37 76.04,11.91 SPI_CON.2
  Bottom 0.813: SPI_CON.2 83.34,11.91
(copper drawn outside any net)
  shapes: Top area x2

## Text on the board
Top: A_SEL verbinden! | unterste Spannung vom Board davor